# Altium PCB 飞控板.PcbDoc
Units mil, origin at the board's own origin, x right, y up, seen from the top; angles counter-clockwise.
Board outline 2740.03 x 2865.01 mil, 4 copper layers (Top Layer, VCC, GND, Bottom Layer); 69 components, 95 nets, 366 pads, 117 vias.
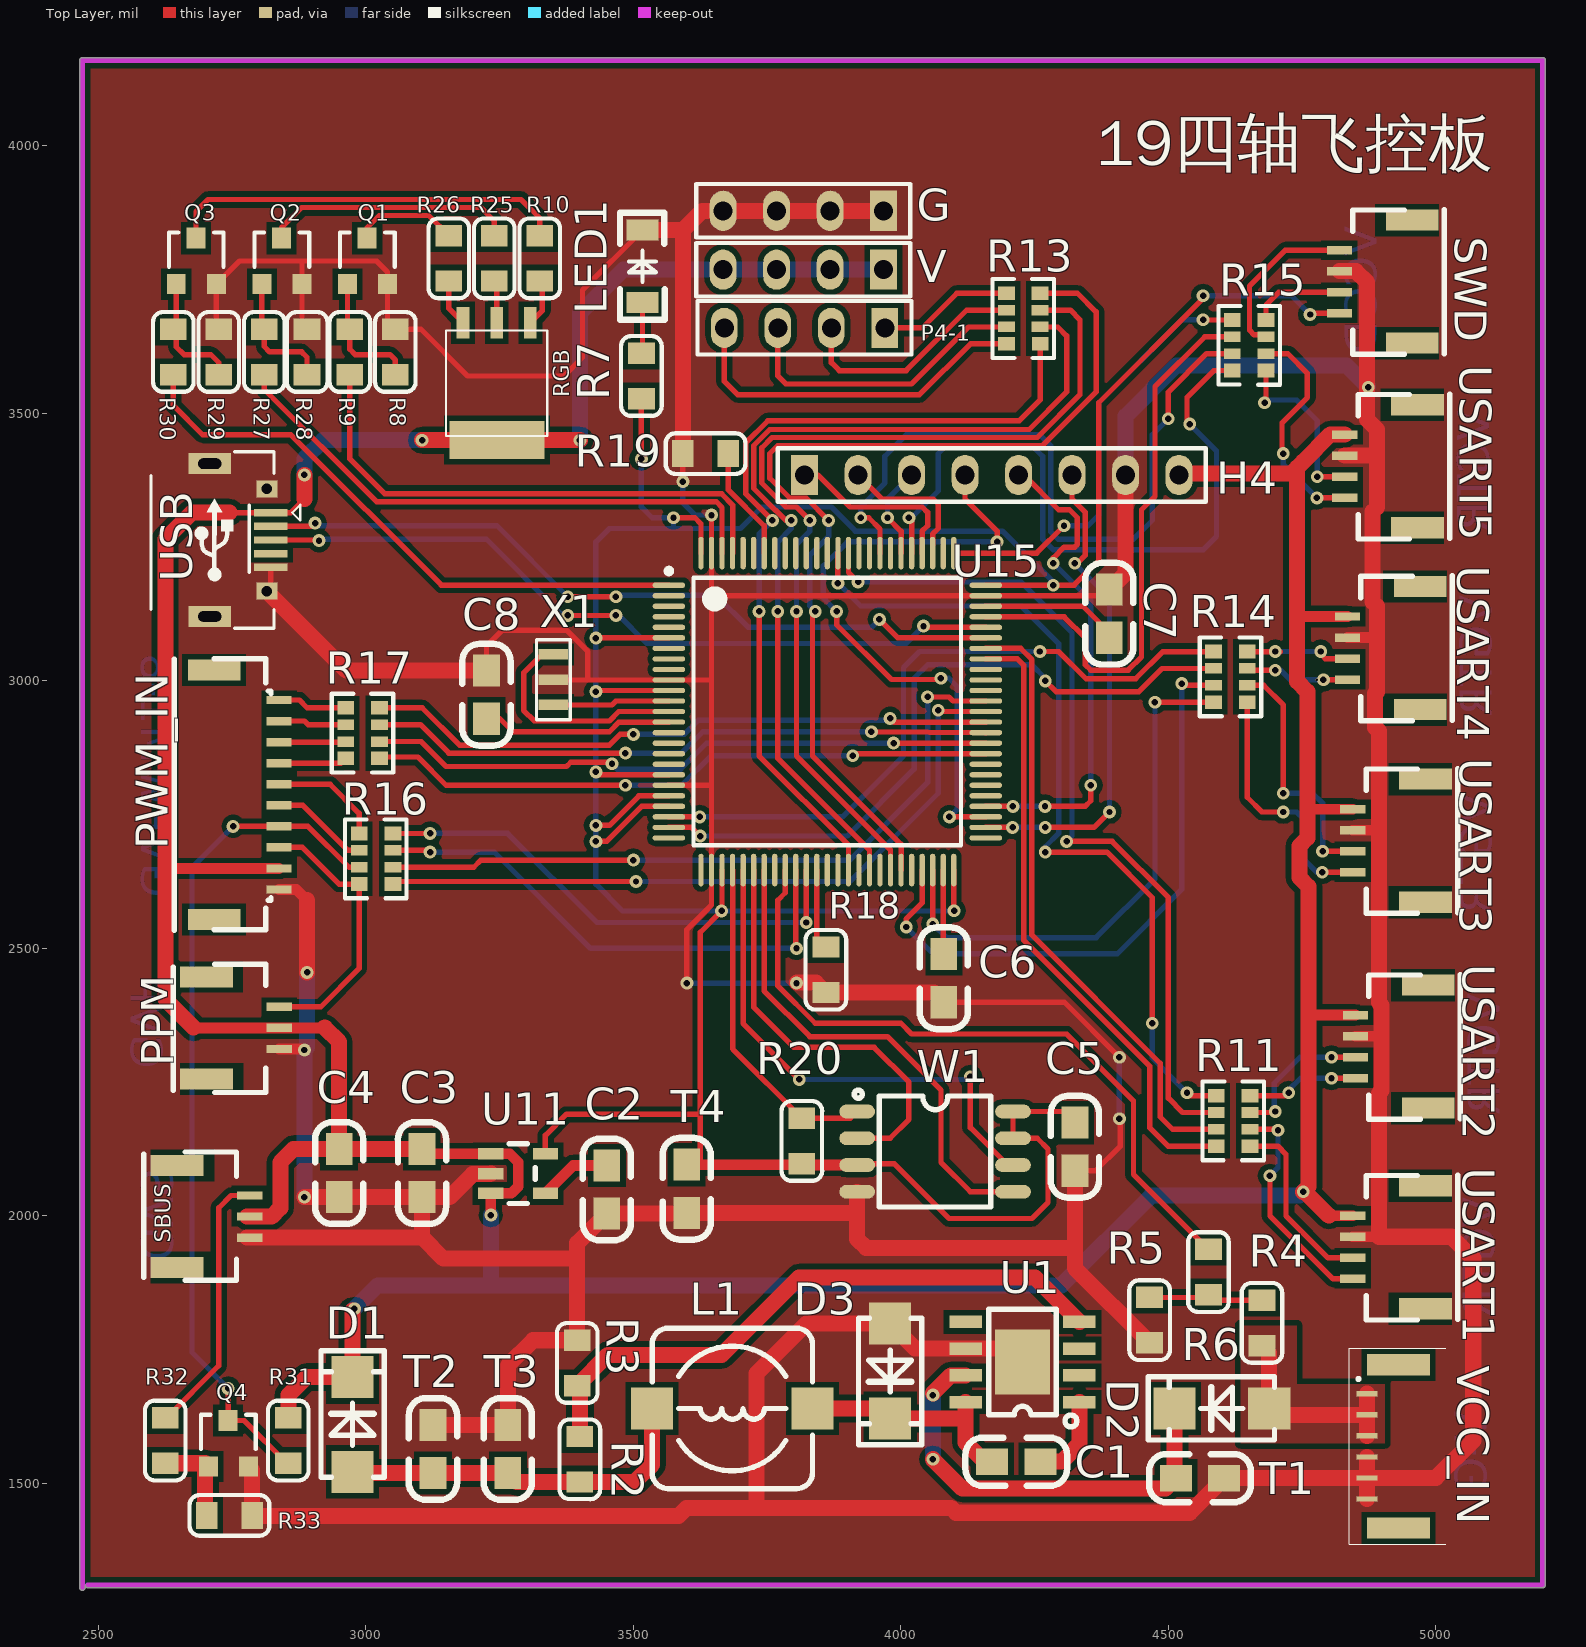
[diagram p0: Top Layer view]
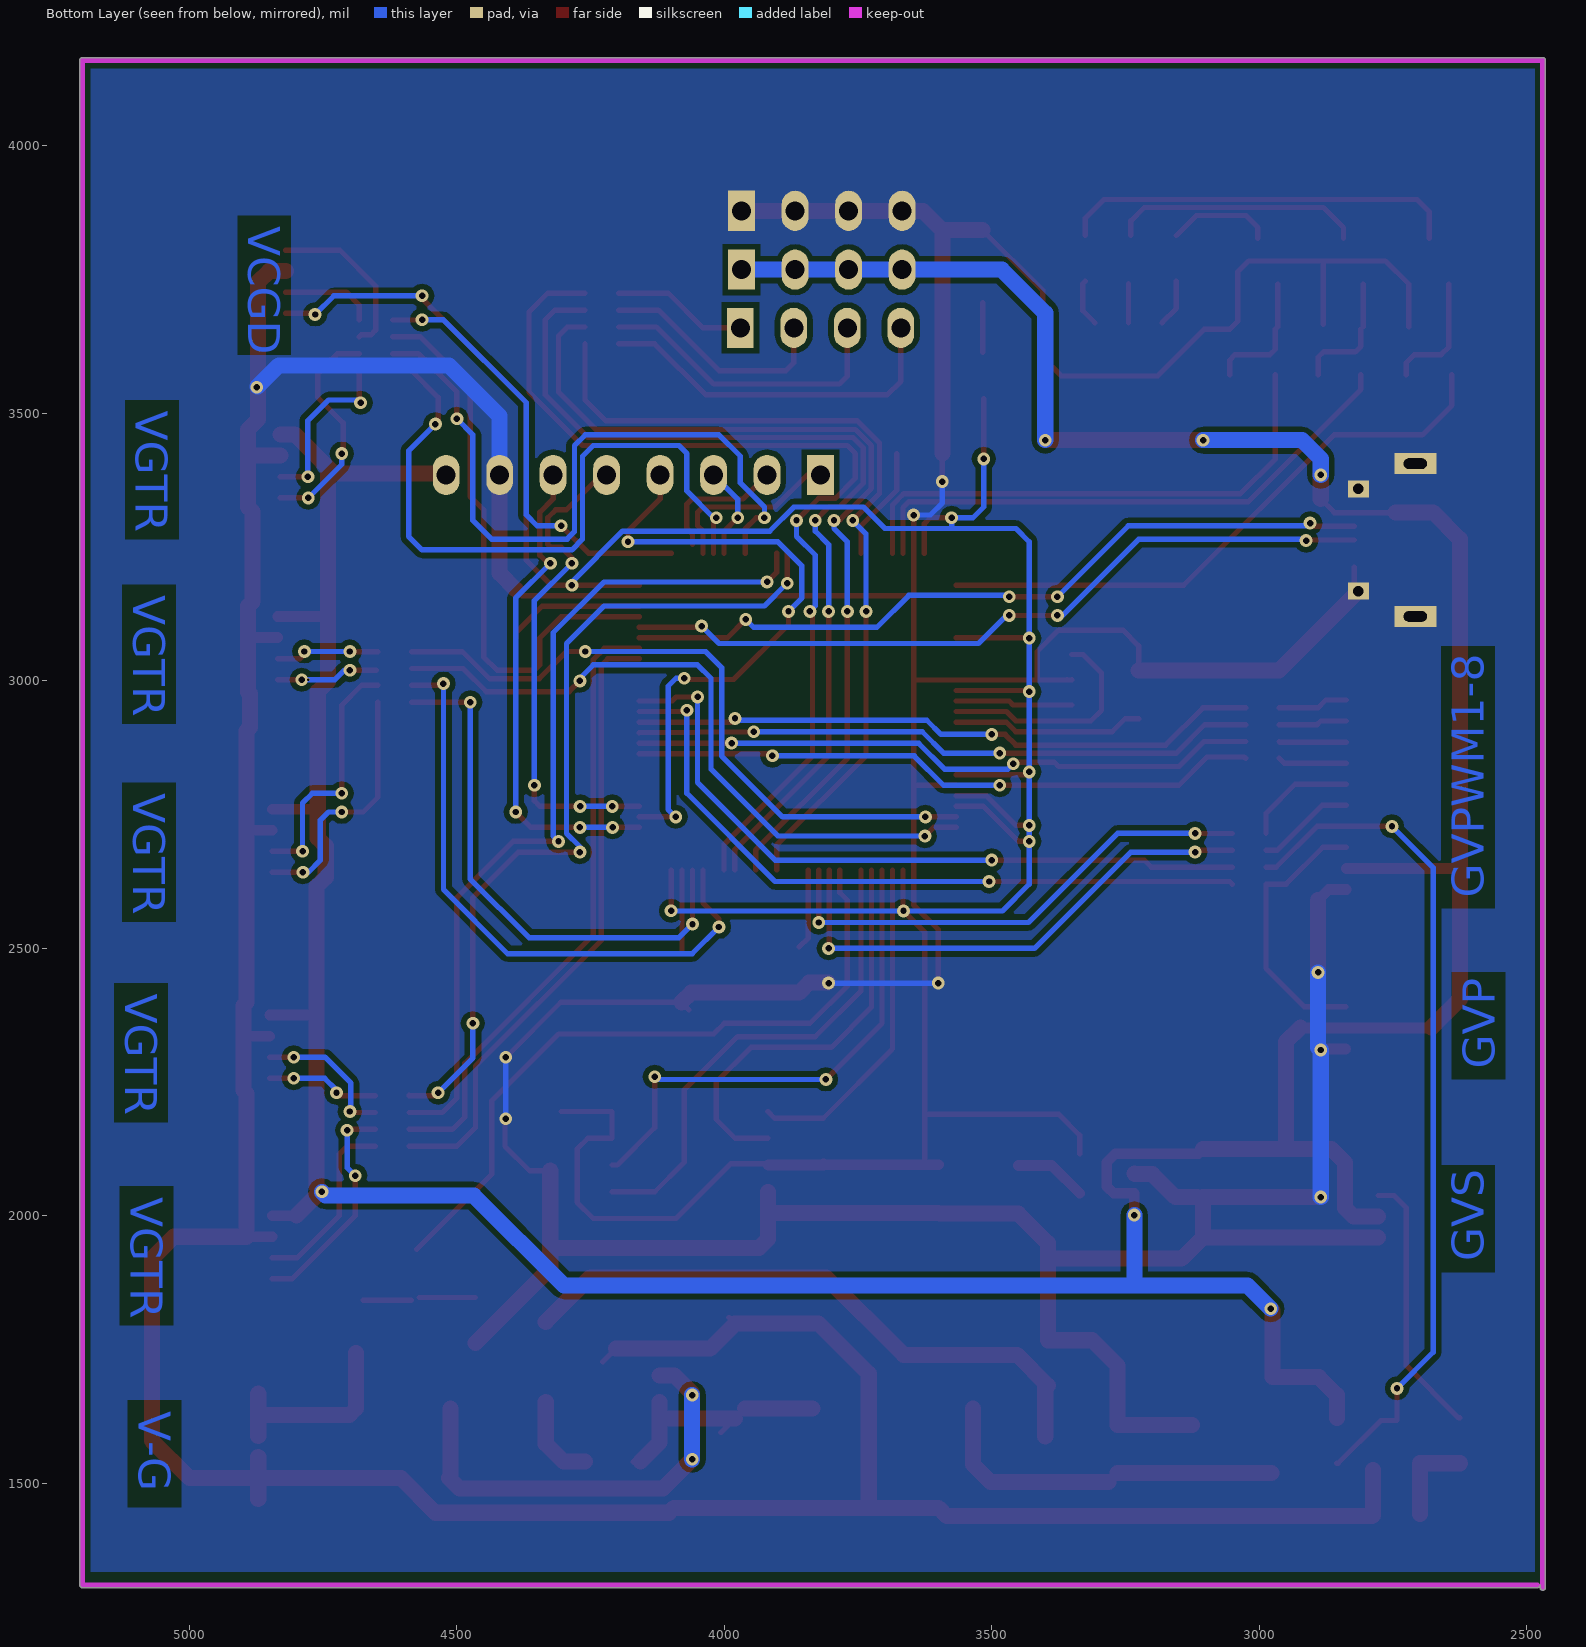
[diagram p1: Bottom Layer view, seen from below]
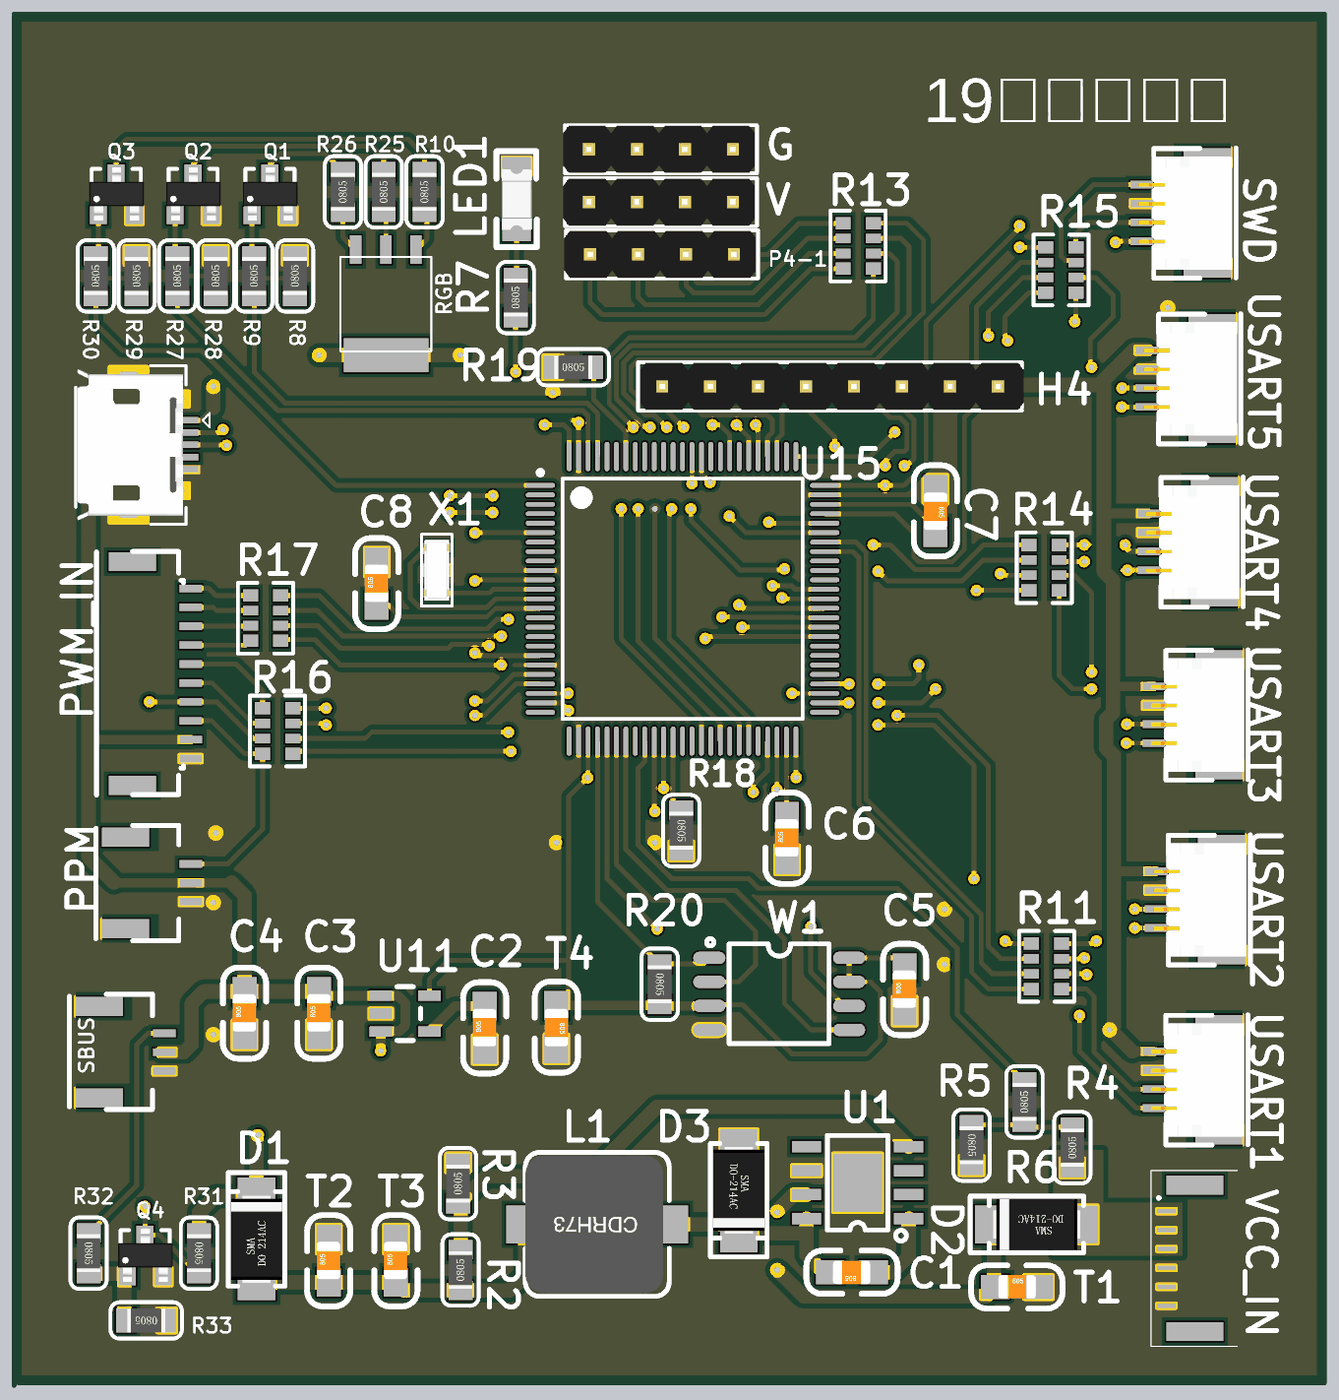
[diagram p2: 3D render of the assembled board from above, using the file's embedded part models]

## Layer stack, top to bottom
Top Layer: signal copper 1.4
Dielectric: core 12.6, FR-4, Dk 4.8
VCC: signal copper 1.4
Dielectric: prepreg 12.6, FR-4, Dk 4.8
GND: signal copper 1.4
Dielectric: core 12.6, FR-4, Dk 4.8
Bottom Layer: signal copper 1.4

## Board outline
2464.99,1305 2464.99,4155 cw(c2470,4155) 2465.65,4157.5 cw(c2470,4160) 2470,4165.02 5200,4165.02 cw(c5200,4160) 5205.02,4160 5205.02,1310 cw(c5200,1310) 5200,1304.98 2480,1304.98 cw(c2480,1310) 2475.01,1309.45 2475.01,1305 cw(c2470,1305)

## Design rules (kind name [scope] priority, off if disabled: settings)
Clearance Clearance_5 [All] p1: gap=10
Clearance Clearance_4 [All] p2: gap=10
Clearance Clearance_3 [All] p3: gap=1
Clearance Clearance_2 [All] p4: gap=1
Clearance Clearance_1 [All] p5: gap=1
Clearance [All] p6: gap=1
PlaneConnect [All] p1: planeconnectstyle=Relief reliefexpansion=20 reliefentries=4 reliefconductorwidth=20 reliefairgap=10
PolygonConnect [All] p1: connectstyle=Direct reliefconductorwidth=20 reliefentries=4 polygonreliefangle="90 Angle"
RoutingVias [All] p1: holewidth=28 width=50 viastyle="Through Hole" minholewidth=28 minwidth=50 maxholewidth=28 maxwidth=50
SilkscreenOverComponentPads [All] p1: minsilkscreentomaskgap=10
SolderMaskExpansion [All] p1: expansion=4
Width [All] p1: maxlimit=30 minlimit=30 preferedwidth=30
26 further rules are at their usual default settings.

## Components (designator, comment, footprint, x,y, rotation, side; value= is the part's Value field where it differs from the comment)
C1 "10nF50V" 0805C 4260,1540 r180 top
C2 "0.1uf50v" 0805C 3450,2005 r90 top
C3 "0.1uf50v" 0805C 3104.6,2035.71 r90 top
C4 "4.7uf16v" 0805C 2949.6,2035.71 r90 top
C5 "1uf10v" 0805C 4325,2085 r90 top
C6 "0.1uf50v" 0805C 4080,2400 r90 top
C7 "0.1uf50v" 0805C 4390,3170 r270 top
C8 "0.1uf50v" 0805C 3225,2930 r90 top
D1 "1N5819" DO214AC_SMA 2975,1610 r90 top
D2 "1N5819" DO214AC_SMA 4600,1640 r180 top
D3 "1N5819" DO214AC_SMA 3980,1710 r270 top
G "Header 4" HDR1X4 3817.68,3878.78 r180 top (schematic designator H3)
H4 "Header 8" HDR1X8 4170,3385 r0 top
L1 "CD54-22UH2A" CDRH73 3685,1640 r180 top
LED1 "" LED-1206 3515,3785 r180 top
P4-1 "Header 4" HDR1X4 3820,3660 r180 top (schematic designator H1)
PPM "PPM" SH1.0-3P#1 2770,2370 r90 bottom (schematic designator U9)
PWM_IN "SH1.0-10P" SH1.0-10P 2755,2765 r90 top (schematic designator P1)
Q1 "" SI2310 2995,3780 r180 top
Q2 "" SI2310 2835,3780 r180 top
Q3 "" SI2310 2675,3780 r180 top
Q4 "" SI2310 2735,1570 r180 top
R2 "50K" 0805R 3400,1545 r90 top
R3 "15K" 0805R 3395,1725 r90 top
R4 "10K" 0805R 4675,1800 r90 top
R5 "1K" 0805R 4465,1805 r270 top
R6 "1K" 0805R 4575,1895 r90 top
R7 "1K" 0805R 3515,3570 r90 top
R8 "10K" 0805R 3055,3615 r90 top
R9 "1K" 0805R 2970,3615 r90 top
R10 "50R" 0805R 3325,3790 r90 top
R11 "1k0603" 1k0603#1 4620,2185 r270 top
R13 "1k0603" 1k0603#2 4230,3685 r270 top
R14 "1k0603" 1k0603#2 4615,3000 r90 top
R15 "1k0603" 1k0603#1 4650,3635 r270 top
R16 "1k0603" 1k0603#2 3020,2675 r270 top
R17 "1k0603" 1k0603#2 2995,2910 r270 top
R18 "10K" 0805R 3860,2460 r270 top
R19 "10K" 0805R 3635,3425 r0 top
R20 "4.3K" 0805R 3815,2140 r270 top
R25 "50R" 0805R 3240,3790 r90 top
R26 "50R" 0805R 3155,3790 r90 top
R27 "1K" 0805R 2810,3615 r90 top
R28 "10K" 0805R 2890,3615 r90 top
R29 "10K" 0805R 2725,3615 r90 top
R30 "1K" 0805R 2640,3615 r90 top
R31 "10K" 0805R 2855,1580 r270 top
R32 "10K" 0805R 2625,1580 r270 top
R33 "10K" 0805R 2745,1440 r180 top
RGB "" RGB_LED 3150,3655 r270 top
SBUS "SBUS" SH1.0-3P#2 2715,1980 r270 bottom (schematic designator U8)
SWD "SWD" SH1.0-4P 4930,3750 r270 top (schematic designator U10)
T1 "100uf25V" 0805C 4515,1510 r0 top
T2 "47UF16V" 0805C 3125,1520 r90 top
T3 "47UF16V" 0805C 3265,1520 r90 top
T4 "10uf25V" 0805C 3600,2095 r270 top
U1 "TPS5430" TPS5430 4235,1760 r90 top
U11 "MIC5219" MIC5219 3280,2065 r270 top
U15 "" STM32F407VGT6= 3855,2925 r0 top
USART1 "USART1" SH1.0-4P 4955,1945 r270 top (schematic designator U3)
USART2 "USART2" SH1.0-4P 4960,2320 r270 top (schematic designator U4)
USART3 "USART3" SH1.0-4P 4955,2705 r270 top (schematic designator U5)
USART4 "USART4" SH1.0-4P 4945,3065 r270 top (schematic designator U6)
USART5 "USART5" SH1.0-4P 4940,3405 r270 top (schematic designator U7)
USB "ANO-USB" ANO-USB 2720,3260 r270 bottom (schematic designator U2)
V "Header 4" HDR1X4 3817.68,3768.78 r180 top (schematic designator H2)
VCC_IN "sh1.0-6p" sh1.0-6p 4935,1590 r90 top (schematic designator sh1.0-6p)
W1 "W25Q32" W25Q32 4075,2115 r270 top
X1 "陶瓷晶振" 陶瓷晶振 3360,2995 r270 top

## Footprints (in the part's own frame and the unit in brackets; to place one, negate y for a bottom-side part, rotate by r counter-clockwise, add the part's x,y. Pads: shape width x height; smd on the part's side, far side on the other; paste and mask are expansions set on the pad)
1k0603#1 [mm]
  rect 0.65x0.8 smd: 1(-1.008,-0.774) 4(1.392,-0.774) 5(1.392,0.826) 8(-1.008,0.826)
  rect 0.5x0.8 smd: 2(-0.208,-0.774) 3(0.592,-0.774) 6(0.592,0.826) 7(-0.208,0.826)
  silkscreen extent -1.68,-1.42 2.06,1.5
1k0603#2 [mm]
  rect 0.65x0.8 smd: 1(-1.008,0.774) 4(1.392,0.774) 5(1.392,-0.826) 8(-1.008,-0.826)
  rect 0.5x0.8 smd: 2(-0.208,0.774) 3(0.592,0.774) 6(0.592,-0.826) 7(-0.208,-0.826)
  silkscreen extent -1.68,-1.5 2.06,1.42
0805C [mil]
  rect 60x50 smd: 1(-0.71,-0.4) 2(89.29,-0.4)
  silkscreen extent -51,-45 139,45, body extent 6,-25 84,25, height 31
0805R [mil]
  rect 40x50 smd: 1(-42.5,0) 2(42.5,0)
  silkscreen extent -75,-38 75,38, body extent -39,-25 39,25, height 22
ANO-USB [mm]
  rect 0.35x1.6 smd far side: 1(-1.385,-2.599) 2(-0.735,-2.599) 3(-0.085,-2.599) 4(0.565,-2.599) 5(1.215,-2.599)
  rect 1x2 hole 0.5 slot 1.1 at 90 deg: 5(-3.71,0.301) 5(3.54,0.301)
  rect 0.8x1 hole 0.5: 5(-2.51,-2.409) 5(2.34,-2.409)
  body extent -4.09,-2.59 3.92,3.01, height 2.8
CDRH73 [mm]
  rect 2x2 smd: 1(-3.81,0) 2(3.81,0)
  silkscreen extent -3.81,-3.81 3.81,3.81, body extent -3.49,-3.65 3.81,3.65, height 3.65
DO214AC_SMA [mm]
  rect 2x2 smd: 1(-2.25,0) 2(2.25,0)
  silkscreen extent -2.5,-1.5 3.5,1.5, body extent -2.33,-1.35 2.27,1.35, height 2.4
HDR1X4 [mm]
  rect 1.27x1.905 hole 0.9: 1(-3.81,0)
  oval 1.27x1.905 hole 0.9: 2(-1.27,0) 3(1.27,0) 4(3.81,0)
  silkscreen extent -5.08,-1.27 5.08,1.27, body extent -4.98,-1.25 5.18,1.25, height 8.2
HDR1X8 [mm]
  rect 1.27x1.905 hole 0.9: 1(-8.89,0)
  oval 1.27x1.905 hole 0.9: 2(-6.35,0) 3(-3.81,0) 4(-1.27,0) 5(1.27,0) 6(3.81,0) 7(6.35,0) 8(8.89,0)
  silkscreen extent -10.16,-1.27 10.16,1.27, body extent -10.06,-1.25 10.26,1.25, height 8.2
LED-1206 [mil]
  rect 59.05x39.37 smd: 1(-2,77.5) 2(-2,-57.5)
  silkscreen extent -44,-90 40,110, body extent -33,-52 30,74, height 43
MIC5219 [mil]
  rect 21.7x47.2 smd: 1(-51,-46.4) 2(-14,-46.4) 3(23,-46.4) 4(23,55.6) 5(-51,55.6)
  silkscreen extent -70,-12 42,37
RGB_LED [mm]
  rect 1.8x4.5 smd: 1(5.207,2.413)
  rect 1.5x0.6 smd: 2(-0.373,0.8) 4(-0.373,2.4) 6(-0.373,4)
  silkscreen extent 0,0 5,4.8, body extent 0,0 4.95,4.83, height 3
SH1.0-3P#1 [mm]
  rect 1x2.5 smd far side: 0(-2.897,-1.728) 0(1.945,-1.728)
  rect 0.4x1.2 smd far side: 1(0.525,1.729) 2(-0.475,1.729) 3(-1.475,1.729)
SH1.0-3P#2 [mm]
  rect 1x2.5 smd far side: 0(-2.897,1.728) 0(1.945,1.728)
  rect 0.4x1.2 smd far side: 1(0.525,-1.729) 2(-0.475,-1.729) 3(-1.475,-1.729)
SH1.0-4P [mm]
  rect 0.4x1.2 smd: 1(-1.406,-2.799) 2(-0.406,-2.799) 3(0.594,-2.799) 4(1.594,-2.799)
  rect 1x2.5 smd: 5(-2.827,0.658) 5(3.015,0.658)
  silkscreen extent -3.33,-2.16 3.55,2.18, body extent -2.89,-2.97 3.11,1.99, height 3.14
sh1.0-6p [mm]
  rect 0.25x1 smd: 1(1.968,1.621) 2(0.968,1.621) 3(-0.032,1.621) 4(-1.032,1.621) 5(-2.032,1.621) 6(-3.032,1.621)
  rect 1x3 smd: PAD(-4.407,0.121) PAD(3.343,0.121)
  silkscreen extent -5.18,-2.13 4.12,2.45
SH1.0-10P [mm]
  rect 1x2.5 smd: 0(-5.358,0.982) 0(6.484,0.982)
  rect 0.4x1.2 smd: 1(-3.937,-2.099) 2(-2.937,-2.099) 3(-1.937,-2.099) 4(-0.937,-2.099) 5(0.063,-2.099) 6(1.063,-2.099) 7(2.063,-2.099) 8(3.063,-2.099) 9(4.063,-2.099) 10(5.063,-2.099)
  silkscreen extent -5.87,-1.72 7.02,2.88
SI2310 [mm]
  rect 0.9x0.95 smd: 1(0.75,0.976) 2(-1.155,0.976)
  rect 0.9x1 smd: 3(-0.19,-1.208)
  silkscreen extent -1.5,-1.47 1.1,0.15, body extent -1.67,-1.54 1.23,1.26, height 1.3
STM32F407VGT6= [mm]
  oval 1.55x0.25 smd: 1(-7.33,6.449) 2(-7.33,5.949) 3(-7.33,5.449) 4(-7.33,4.949) 5(-7.33,4.449) 6(-7.33,3.949) 7(-7.33,3.449) 8(-7.33,2.949) 9(-7.33,2.449) 10(-7.33,1.949) 11(-7.33,1.449) 12(-7.33,0.949) 13(-7.33,0.449) 14(-7.33,-0.051) 15(-7.33,-0.551) 16(-7.33,-1.051) 17(-7.33,-1.551) 18(-7.33,-2.051) 19(-7.33,-2.551) 20(-7.33,-3.051) 21(-7.33,-3.551) 22(-7.33,-4.051) 23(-7.33,-4.551) 24(-7.33,-5.051) 25(-7.33,-5.551) 51(7.72,-5.551) 52(7.72,-5.051) 53(7.72,-4.551) 54(7.72,-4.051) 55(7.72,-3.551) 56(7.72,-3.051) 57(7.72,-2.551) 58(7.72,-2.051) 59(7.72,-1.551) 60(7.72,-1.051) 61(7.72,-0.551) 62(7.72,-0.051) 63(7.72,0.449) 64(7.72,0.949) 65(7.72,1.449) 66(7.72,1.949) 67(7.72,2.449) 68(7.72,2.949) 69(7.72,3.449) 70(7.72,3.949) 71(7.72,4.449) 72(7.72,4.949) 73(7.72,5.449) 74(7.72,5.949) 75(7.72,6.449)
  oval 0.25x1.55 smd: 26(-5.805,-7.076) 27(-5.305,-7.076) 28(-4.805,-7.076) 29(-4.305,-7.076) 30(-3.805,-7.076) 31(-3.305,-7.076) 32(-2.805,-7.076) 33(-2.305,-7.076) 34(-1.805,-7.076) 35(-1.305,-7.076) 36(-0.805,-7.076) 37(-0.305,-7.076) 38(0.195,-7.076) 39(0.695,-7.076) 40(1.195,-7.076) 41(1.695,-7.076) 42(2.195,-7.076) 43(2.695,-7.076) 44(3.195,-7.076) 45(3.695,-7.076) 46(4.195,-7.076) 47(4.695,-7.076) 48(5.195,-7.076) 49(5.695,-7.076) 50(6.195,-7.076) 76(6.195,7.974) 77(5.695,7.974) 78(5.195,7.974) 79(4.695,7.974) 80(4.195,7.974) 81(3.695,7.974) 82(3.195,7.974) 83(2.695,7.974) 84(2.195,7.974) 85(1.695,7.974) 86(1.195,7.974) 87(0.695,7.974) 88(0.195,7.974) 89(-0.305,7.974) 90(-0.805,7.974) 91(-1.305,7.974) 92(-1.805,7.974) 93(-2.305,7.974) 94(-2.805,7.974) 95(-3.305,7.974) 96(-3.805,7.974) 97(-4.305,7.974) 98(-4.805,7.974) 99(-5.305,7.974) 100(-5.805,7.974)
  silkscreen extent -7.45,-5.9 6.55,7.25
TPS5430 [mm]
  rect 0.6x1.55 smd: 1(-2.747,-2.508) 2(-1.477,-2.508) 3(-0.207,-2.508) 4(1.063,-2.508) 5(1.063,2.892) 6(-0.207,2.892) 7(-1.477,2.892) 8(-2.747,2.892)
  rect 3.1x2.6 smd: 9(-0.842,0.192)
  silkscreen extent -3.93,-2.39 1.66,1.79
W25Q32 [mil]
  oval 25.59x66.86 smd: 1(-80,-156.54) 2(-30,-156.54) 3(20,-156.54) 4(70,-156.54) 5(70,134.81) 6(20,134.81) 7(-30,134.81) 8(-80,134.81)
  silkscreen extent -120,-162 99,93
陶瓷晶振 [mm]
  rect 0.5x1.4 smd: 1(-1.384,-0.24) 2(-0.184,-0.24) 3(1.016,-0.24)
  silkscreen extent -2.08,-1.04 1.72,0.56, body extent -1.78,-0.89 1.42,0.41, height 0.7

## Part data
D1 D2 D3: library part 1N58
PWM_IN: library part S
U15: library part STM32F

## Free pads (board coordinates)
  round 5 hole 5: 0(3485,2865) 0(3624.17,2745.83) 0(4260,3055) 0(4777.77,3002.23)
  round 13 hole 8: 0(4050,2970) 0(4070,2945)

## Via types
v1: diameter 24, hole 12, Top Layer to Bottom Layer, 116 vias
v2: diameter 24, hole 12, Top Layer to Bottom Layer, tented top, 1 vias

## Nets (pads, with @x,y where several pads share a name; then routed paths per layer and width w, separated by ;. In a path a pad name is that pad's centre, name@x,y a point inside that pad or via, vN(x,y) a via of type N, cw(c..) or ccw(c..) an arc to the next point about the centre after c; other vN are vias at no path point)
BOOT1: R18.1 U15.37 | length 151
  Top Layer w10: U15.37 3843,2519.5 R18.1
GND: C2.1 C3.1 C4.1 C5.1 C6.1 C7.1 C8.2 D3.1 G.1 G.2 G.3 G.4 H4.7 LED1.2 PPM.3 PWM_IN.1 Q1.2 Q2.2 Q3.2 Q4.2 R3.2 R5.2 R8.2 R18.2 R19.1 R28.2 R29.2 R33.1 SBUS.1 SWD.2 T1.2 T2.2 T3.2 T4.2 U1.6 U1.9 U11.2 U15.10 U15.20 U15.27 U15.74 U15.99 USART1.2 USART2.2 USART3.2 USART4.2 USART5.2 USB.5 VCC_IN.4 VCC_IN.5 VCC_IN.6 W1.4 X1.2 | length 16995.1
  Top Layer w10: R29.2@2720.48,3662.02 Q3.2 2763.91,3785 3020,3785 3040.48,3764.52 Q1.2 3040.48,3672.02 R8.2 3102.5,3657.5 3190,3570 3370,3570 3405,3605 3405,3730.5 LED1.2 ; USB.5@2814.84,3167.87 2822.32,3175.35 USB.5@2822.32,3212.17 ; PPM.3 PPM.3@2839.99,2310 ; R28.2@2880.48,3667.02 Q2.2 2880.48,3780.48 ; v1@2883.09,2311.91 v1(2885,2310) ; C3.1 C3.1@3115,2035 ; C8.2@3221.11,3015 C8.2 3225.4,3065.4 3255,3095 3375,3095 3415,3055 3415,3001.74 ; X1.2 3351.06,3001.74 X1.2@3360.47,3001.74 ; X1.2@3359.45,3002.76 X1.2@3360.47,3001.74 ; U15.20 3646.01,2804.88 ; v1(3592.5,3372.5) R19.1 ; v1(3600,2435) 3600,2535 3646.14,2581.14 U15.27 3646.14,3001.74 ; v1(3646.14,3310) U15.99 3646.14,3001.74 ; 3646.92,3159.22 U15.74 4378.11,3159.22 C7.1 ; D3.1 D3.1@3991.42,1810 ; C6.1@4066.11,2385 C6.1 4305.71,2399.29 v1(4408.6,2296.4) ; U1.9@4202.45,1751.85 U1.9 ; C5.1 4364.29,2084.29 4410,2130 v1@4410,2180 ; T1.2 T1.2@4606.93,1512.23 ; X1.2@3360.47,3001.74 3415,3001.74 ; 3415,3001.74 U15.10 3646.14,3001.74
  Top Layer w20: PWM_IN.1 2870,2610 2890,2590 ; PPM.3 v1@2883.09,2311.91 ; USART4.2 4885.97,3080.97 ; USART1.2 4892.47,1960.97 ; USART3.2 4892.47,2720.97 ; USART2.2 4897.47,2335.97
  Top Layer w30: SBUS.1@2778.08,1959.35 3104.35,1959.35 ; Q4.2@2787.5,1524.55 R33.1 2788.79,1438.71 3584.01,1438.71 3599.52,1454.22 3730,1454.22 ; USB.5@2814.84,3167.87 2963.42,3019.29 C8.2 ; v1(2885,2035) C4.1 C3.1 3105,1960 3145,1920 3390,1920 ; v1(2890,2455) 2890,2590 ; C3.1@3115,2035 3156.79,2035 3199.64,2077.85 3232.45,2077.85 U11.2 ; T2.2 T3.2 3265.4,1720.4 3312.5,1767.5 R3.2 3395,1948.89 C2.1 T4.2@3598.19,2004.29 ; LED1.2 3592.5,3842.5 ; R19.1 3592.5,3842.5 ; T4.2 3917.76,2005.71 ; G.4 G.4@3670,3878.78 ; G.4@3675,3883.78 G.4@3670,3878.78 ; v1@3806.21,2436.21 3841.29,2436.21 R18.2 4062.2,2417.5 C6.1 ; W1.4 3918.46,1956.54 3935,1940 4320,1940 ; G.1 G.2 G.3 G.4@3670,3878.78 ; U1.9@4202.45,1751.85 U1.6 4026.73,1751.85 D3.1 3823.58,1798.58 3730,1705 3730,1454.22 ; C5.1 4325.4,1902.1 R5.2 ; C7.1 4420,3201.11 H4.7 ; T1.2@4604.29,1509.24 4540.05,1445 4103.43,1445 4094.21,1454.22 3730,1454.22 ; T1.2 4825,1509.6 ; SWD.2 4850.73,3765.97 4871.71,3745 4871.71,3488.29 4890,3470 4890,3324.62 4881.71,3316.33 4881.71,3147.95 4890,3139.66 4890,2979.62 4886.71,2976.33 4886.71,2912.95 ; 4825.41,1510 VCC_IN.5 ; USART5.2 4889.03,3420.97 ; VCC_IN.6 VCC_IN.5 ; VCC_IN.4 VCC_IN.5 ; 4890,2909.66 4893.44,2906.22 4893.44,2398.57 4898.44,2393.57 4898.44,2234 4893.44,2229 4893.44,1960.97 5029.03,1960.97 5070,1920 5070,1580 5000,1510 VCC_IN.5 ; 3592.5,3842.5 3628.78,3878.78 G.4@3670,3878.78
  Bottom Layer w10: v1(2885,2035) v1@2891.28,2041.28 ; v1@2885,2450 v1(2890,2455) ; v1(3592.5,3372.5) 3592.5,3332.5 3615,3310 v1(3646.14,3310) ; v1(3600,2435) v1(3805,2435) ; v1(4408.6,2181.4) v1(4408.6,2296.4) ; v1@4872.8,3550 v1(4873.9,3548.9)
  Bottom Layer w30: v1(2885,2035) v1(2885,2310) ; v1@2890,2315 v1(2890,2455) ; H4.7 4420,3495 4515,3590 4832.8,3590 v1@4872.8,3550
LED_1: R9.1 U15.97 | length 999
  Top Layer w10: R9.1 2970,3415 3035,3350 3665,3350 3666.5,3348.5 3666.5,3347.94 3685.51,3328.94 U15.97
LED_2: R27.1 U15.98 | length 1060
  Top Layer w10: R27.1 2810,3545 3020,3335 3655,3335 3665.83,3324.17 U15.98
LED_3: R30.1 U15.1 | length 1123.1
  Top Layer w10: R30.1 2640,3515 2695,3460 2860,3460 3141.1,3178.9 U15.1
NetC1_1: C1.1 U1.1 | length 165
  Top Layer w30: C1.1 4300.4,1540.4 4333.75,1573.75 U1.1
NetC1_2: C1.2 D3.2 L1.1 U1.8 | length 477.2
  Top Layer w10: D3.2@3961.42,1640 D3.2 D3.2@4006.42,1595 ; C1.2@4149.6,1540.4 4156.9,1540.4 C1.2
  Top Layer w30: L1.1 D3.2@3961.42,1640 ; D3.2 4119.73,1621.42 ; U1.8 4121.15,1576.15 C1.2@4156.9,1540.4
NetC2_2: C2.2 U11.4 | length 136.5
  Top Layer w20: U11.4 3387.89,2094.29 C2.2
NetC6_2: C6.2 U15.49 | length 155.9
  Top Layer w10: C6.2@4079.22,2490.48 U15.49
NetC7_2: C7.2 U15.73 | length 260.7
  Top Layer w10: U15.73 4340.47,3139.53 4389.6,3090.4 C7.2
NetC8_1: C8.1 U15.14 | length 358.5
  Top Layer w10: C8.1 3250.71,2929.29 3275,2905 3455,2905 3472.99,2922.99 U15.14
NetD1_1: D1.1 L1.2 R2.1 T2.1 T3.1 | length 683.3
  Top Layer w10: T3.1 T3.1@3282.2,1502.5
  Top Layer w30: D1.1@2977.12,1519.29 T2.1 T3.1 ; T3.1@3282.2,1502.5 R2.1 3502.5,1502.5 3535,1535 L1.2
NetLED1_1: LED1.1 R7.2 | length 93
  Top Layer w10: R7.2@3517,3614.5 LED1.1
NetQ1_1: Q1.1 R8.1 R9.2 | length 237.8
  Top Layer w10: R9.2@2965.48,3662.02 Q1.1 ; R9.2 2970,3620 2980,3610 3045,3610 3055,3600 R8.1
NetQ1_3: Q1.3 R26.2 | length 197.3
  Top Layer w10: Q1.3 3002.48,3847.48 3025,3870 3117.5,3870 R26.2
NetQ2_1: Q2.1 R27.2 R28.1 | length 232.8
  Top Layer w10: R27.2@2805.48,3662.02 Q2.1 ; R27.2 2810,3625 2820,3615 2880,3615 2890,3605 R28.1
NetQ2_3: Q2.3 R25.2 | length 470.8
  Top Layer w10: Q2.3 2842.48,3847.48 2880,3885 3215,3885 3240,3860 R25.2
NetQ3_1: Q3.1 R29.1 R30.2 | length 231.3
  Top Layer w10: Q3.1 2645.48,3624.52 2660,3610 2710,3610 2725,3595 R29.1
NetQ3_3: Q3.3 R10.2 | length 748.8
  Top Layer w10: Q3.3 2682.48,3877.48 2705,3900 3290,3900 3325,3865 R10.2
NetQ4_1: Q4.1 R32.2 R33.2 | length 169.1
  Top Layer w30: R32.2 2699.55,1537.5 R33.2@2699.55,1442.95
NetR2_2: R2.2 R3.1 U1.4 | length 1147.1
  Top Layer w30: R3.1 3452.5,1740 3665,1740 3810,1885 4250.6,1885 U1.4 ; R2.2 R3.1@3400,1677.5
NetR4_2: R4.2 R5.1 R6.1 | length 195
  Top Layer w10: R5.1 R6.1@4570,1847.5 ; R6.1@4585,1842.5 R4.2
NetR10_1: R10.1 RGB.6 | length 89.2
  Top Layer w10: RGB.6 3330,3692.2 3330,3742.5 R10.1
NetR19_2: R19.2 U15.94 | length 213.8
  Top Layer w10: R19.2 3677.5,3357.04 3744.57,3289.98 U15.94
NetR25_1: R25.1 RGB.4 | length 73.3
  Top Layer w10: RGB.4 R25.1@3244.49,3743.01
NetR26_1: R26.1 RGB.2 | length 88.8
  Top Layer w10: R26.1 3155,3696.18 RGB.2
NetU15_12: U15.12 X1.3 | length 218.9
  Top Layer w10: X1.3 3460,2955 3467.37,2962.37 U15.12
NetU15_13: U15.13 X1.1 | length 426.9
  Top Layer w10: X1.1 3329.49,3049.49 3295,3015 3295,2945 3315,2925 3455,2925 3472.68,2942.68 U15.13
OTG_FS_DM: U15.70 USB.2 | length 1431.8
  Top Layer w10: USB.2 2898.94,3288.94 v1(2905,3295) ; v1(3377.37,3157.37) v1(3467.37,3157.37) ; v1(3960,3115) 3994.52,3080.48 U15.70
  Bottom Layer w10: v1@2910,3290 3244.74,3290 v1(3377.37,3157.37) ; v1@3470,3160 3655,3160 3715,3100 3945,3100 v1(3960,3115)
OTG_FS_DP: U15.71 USB.3 | length 1424.2
  Top Layer w10: USB.3 2911.39,3263.35 v1(2912.37,3262.37) ; v1(3377.37,3122.37) v1(3467.37,3122.37) ; v1@4045.16,3100.16 U15.71
  Bottom Layer w10: v1@2915,3265 3225,3265 3367.63,3122.37 v1(3377.37,3122.37) ; v1@3470,3125 3525,3070 4010,3070 v1(4042.37,3102.37)
POWER_INPUT: R6.2 U15.34 | length 1311.7
  Top Layer w10: U15.34 3783.94,2603.94 3770,2590 3770,2430 3840,2360 4000,2360 4020,2340 4310,2340 4435,2215 4435,2077.5 R6.2
PPM_IN: PPM.1 PWM_IN.3 R16.5 | length 515.1
  Top Layer w10: PWM_IN.3 2881.26,2688.74 2949.81,2620.19 R16.5 2987.48,2462.48 2915.65,2390.65 PPM.1
PWMIN_2: PWM_IN.4 Q4.3 R16.6 R31.2 | length 1583.3
  Top Layer w10: v1(2742.48,1677.48) Q4.3 2772.43,1617.57 2852.5,1537.5 R31.2 ; v1(2751.89,2728.11) PWM_IN.4 2891.89,2728.11 2968.32,2651.68 R16.6
  Bottom Layer w10: v1(2742.48,1677.48) 2675,1744.96 2675,2651.22 v1(2751.89,2728.11)
PWMIN_3: PWM_IN.5 R16.7 | length 184.8
  Top Layer w10: PWM_IN.5 2882.52,2767.48 2966.82,2683.18 R16.7
PWMIN_4: PWM_IN.6 R16.8 | length 210.2
  Top Layer w10: PWM_IN.6 2933.15,2806.85 2987.48,2752.52 R16.8
PWMIN_5: PWM_IN.7 R17.5 | length 128.6
  Top Layer w10: PWM_IN.7 2953.52,2846.22 R17.5
PWMIN_6: PWM_IN.8 R17.6 | length 125.3
  Top Layer w10: PWM_IN.8 2961.39,2885.59 R17.6
PWMIN_7: PWM_IN.9 R17.7 | length 127.7
  Top Layer w10: PWM_IN.9 2837.68,2925 2885,2925 2891.82,2918.18 R17.7
PWMIN_8: PWM_IN.10 R17.8 | length 130.9
  Top Layer w10: PWM_IN.10 2875.67,2964.33 2890.33,2949.67 R17.8
PWMOUT_1: P4-1.1 R13.8 | length 254.3
  Top Layer w10: P4-1.1 4040,3660 4104.67,3724.67 R13.8
PWMOUT_2: P4-1.2 R13.7 | length 445.6
  Top Layer w10: P4-1.2 3870,3595 3885,3580 4010,3580 4123.18,3693.18 R13.7
PWMOUT_3: P4-1.3 R13.6 | length 567.9
  Top Layer w10: P4-1.3 3770,3570 3785,3555 4020,3555 4126.68,3661.68 R13.6
PWMOUT_4: P4-1.4 R13.5 | length 677.3
  Top Layer w10: P4-1.4 3670,3560 3695,3535 4035,3535 4130.19,3630.19 R13.5
SPI1_CLK: U15.30 W1.6 | length 953.7
  Top Layer w10: U15.30 3705.2,2359.8 v1(3810,2255) ; v1(4130,2260) 4130,2164.86 4199.86,2095 W1.6
  Bottom Layer w10: v1(3810,2255) v1@4125,2255
SPI1_MISO: U15.31 W1.2 | length 785.5
  Top Layer w10: U15.31 3724.88,2390.12 3800,2315 3950,2315 4015,2250 4015,2180 3980,2145 W1.2
SPI1_MOSI: U15.32 W1.5 | length 925.8
  Top Layer w10: U15.32 3744.57,2420.43 3830,2335 3975,2335 4075,2235 4075,2100 4130,2045 W1.5
SPI1_NSS: R20.1 U15.29 W1.1 | length 624.8
  Top Layer w10: 3685.51,2311.99 U15.29 ; 3686.5,2311 R20.1 3905.96,2182.5 W1.1
SPI2_CLK: H4.6 U15.52 | length 916.5
  Top Layer w10: U15.52 v1(4208.86,2726.14) ; v1(4270,2726.14) 4361.14,2726.14 v1(4390,2755) ; H4.6 4320,3340 4345,3315 4345,3235 v1@4330,3220
  Bottom Layer w10: v1(4208.86,2726.14) v1(4270,2726.14) ; v1(4325,3220) 4390,3155 v1(4390,2755)
SPI2_CS1: H4.3 U15.81 | length 195.3
  Top Layer w10: v1(3975,3305) 4000.48,3279.52 U15.81
  Bottom Layer w10: v1(3975,3305) 3975,3340 H4.3 H4.3@4020,3365
SPI2_CS2: H4.2 U15.78 | length 252
  Top Layer w10: H4.2 3965,3340 4060.53,3340 4070,3330.53 4070,3285 4059.53,3274.53 U15.78@4059.53,3255.47
SPI2_CS3: H4.1 U15.79 | length 359.3
  Top Layer w10: H4.1@3820,3365 H4.1 3845,3385 3905,3325 4040,3325 4050,3315 4050,3290 4039.85,3279.85 U15.79
SPI2_MISO: H4.4 U15.53 | length 1206.7
  Top Layer w10: v1(3880,3130) 3880,3105 3982.5,3002.5 4072.5,3002.5 v1(4075,3005) ; v1(4090.83,2745.83) U15.53 ; H4.4 4120,3340 4180,3280 v1(4180,3260)
  Bottom Layer w10: v1(3880,3130) 3855,3155 3855,3215 3900,3260 v1(4180,3260) ; v1(4075,3005) 4090,3005 4105,2990 4105,2760 v1(4090.83,2745.83)
SPI2_MOSI: H4.5 U15.54 | length 931.9
  Top Layer w10: U15.54 v1(4209.49,2765.51) ; H4.5 4230,3385 4295,3320 4315,3320 4330,3305 4330,3255 4325,3250 4305,3250 4285,3230 v1(4285,3220) ; v1(4269.49,2765.51) 4344.49,2765.51 4355,2776.01 v1(4355,2805)
  Bottom Layer w10: v1(4209.49,2765.51) v1(4269.49,2765.51) ; v1(4285,3220) 4355,3150 v1(4355,2805)
SPI2_NSS: U15.51
SUBS_IN: R32.1 SBUS.3 | length 498
  Top Layer w10: R32.1 2627.5,1622.5 2725,1720 2725,2015 2748.09,2038.09 SBUS.3@2778.08,2038.09
SWCLK: R15.1 U15.76 | length 824.4
  Top Layer w10: U15.76 4253.94,3238.94 v1(4305,3290) ; v1(4565,3675) 4565.33,3674.67 R15.1
  Bottom Layer w10: v1(4305,3290) 4350,3290 4370,3310 4370,3520 4525,3675 v1(4565,3675)
SWCLK_I: R15.8 SWD.3 | length 175.1
  Top Layer w10: R15.8 4682.52,3702.52 4706.6,3726.6 SWD.3
SWDIO: R15.2 U15.72 | length 1070.5
  Top Layer w10: U15.72 4305.15,3119.85 4345,3080 4345,3030 4355,3020 4425,3020 4450,3045 4450,3320 4475,3345 4475,3550 4568.18,3643.18 R15.2
SWDIO_I: R15.7 SWD.1 | length 314.4
  Top Layer w10: R15.7 4678.82,3646.88 4660.56,3646.88 4651.78,3655.66 4651.78,3738.28 4718.84,3805.34 SWD.1
TIM1_CH1: R13.4 U15.40 | length 1587.4
  Top Layer w10: v1(3735,3130) 3735,2860 3902.05,2692.95 U15.40 ; v1(3760,3300) 3710,3350 3710,3445 3751.22,3486.22 4221.22,3486.22 4260.47,3525.47 R13.4
  Bottom Layer w10: v1(3735,3130) 3735,3275 v1(3760,3300)
TIM1_CH2: R13.3 U15.42 | length 1697.9
  Top Layer w10: v1(3770,3130) 3770,2855 3941.42,2683.58 U15.42 ; v1(3795,3300) 3785,3300 3778,3307 3778,3307.46 3767.46,3318 3767,3318 3725,3360 3725,3440 3755,3470 4240,3470 4310,3540 4310,3645 4293.32,3661.68 R13.3
  Bottom Layer w10: v1(3770,3130) 3770,3260 3795,3285 v1(3795,3300)
TIM1_CH3: R13.2 U15.44 | length 1779.6
  Top Layer w10: v2(3805,3130) 3805,2860 3980.79,2684.21 U15.44 ; v1(3830,3300) 3805,3325 3785,3325 3740,3370 3740,3435.56 3759.44,3455 4255,3455 4335,3535 4335,3675 4316.82,3693.18 R13.2
  Bottom Layer w10: v2(3805,3130) 3805,3255 3830,3280 v1(3830,3300)
TIM1_CH4: R13.1 U15.45 | length 1858.1
  Top Layer w10: v1(3840,3130) 3835,3125 3835,2860 4000.48,2694.52 U15.45 ; v1(3865,3300) 3823.5,3341.5 3792.51,3341.5 3755,3379.01 3755,3425 3770,3440 4265,3440 4365,3540 4365,3690 4330.33,3724.67 R13.1
  Bottom Layer w10: v1(3840,3130) 3830,3140 3830,3235 3865,3270 v1(3865,3300)
TIM3_CH1: pad.0@4070,2945 R16.4 U15.63 | length 1334.8
  Top Layer w10: R16.4 3055.28,2625 v1(3505,2625) ; v1(4070,2945) 4072.32,2942.68 U15.63
  Bottom Layer w10: v1(3505,2625) 3905,2625 4070,2790 v1(4070,2945)
TIM3_CH2: pad.0@4050,2970 R16.3 U15.64 | length 1337.2
  Top Layer w10: R16.3 3201.68,2651.68 3215,2665 v1(3500,2665) ; v1(4050,2970) 4090,2970 4097.63,2962.37 U15.64
  Bottom Layer w10: v1(3500,2665) 3905,2665 4050,2810 v1(4050,2970)
TIM3_CH3: R16.2 U15.35 | length 977.4
  Top Layer w10: R16.2 3116.82,2683.18 v1(3120,2680) ; U15.35 3803.62,2501.38 v1(3805,2500)
  Bottom Layer w10: v1(3120,2680) 3240,2680 3420,2500 v1(3805,2500)
TIM3_CH4: R16.1 U15.36 | length 939.7
  Top Layer w10: R16.1 v1@3119.67,2714.67 ; v1(3823.31,2548.31) U15.36
  Bottom Layer w10: v1(3120,2715) 3265,2715 3431.69,2548.31 v1(3823.31,2548.31)
TIM4_CH1: R17.4 U15.59 | length 1180.7
  Top Layer w10: R17.4 3027.92,2857.64 3097.36,2857.64 3150,2805 v1(3485,2805) ; v1(3910,2860) 3913.94,2863.94 U15.59
  Bottom Layer w10: v1(3485,2805) 3590,2805 3645,2860 v1(3910,2860)
TIM4_CH2: R17.3 U15.60 | length 1181.6
  Top Layer w10: R17.3 3103.32,2886.68 3150,2840 3375,2840 3383,2848 3457,2848 v1(3460,2845) ; v1(3986.38,2883.62) U15.60
  Bottom Layer w10: v1(3460,2845) 3470,2835 3588.28,2835 3636.78,2883.5 3986.26,2883.5 v1(3986.38,2883.62)
TIM4_CH3: pad.0@3485,2865 R17.2 U15.61 | length 1172.1
  Top Layer w10: R17.2 3101.82,2918.18 3155,2865 v1(3485,2865) ; v1(3945,2905) U15.61
  Bottom Layer w10: v1(3485,2865) 3590,2865 3630,2905 v1(3945,2905)
TIM4_CH4: R17.1 U15.62 | length 1194.9
  Top Layer w10: R17.1 3105.33,2949.67 3175,2880 3455,2880 3475,2900 v1(3500,2900) ; v1(3980,2930) 3987.01,2922.99 U15.62
  Bottom Layer w10: v1(3500,2900) 3595,2900 3621.5,2926.5 3984.47,2926.5 3980.97,2930 v1(3980,2930)
USART1_RX: R11.3 U15.69 | length 1163.3
  Top Layer w10: U15.69 4224.21,3060.79 4245,3040 4245,2525 4485,2285 4485,2185 4508.32,2161.68 R11.3
USART1_RX_I: R11.6 USART1.4 | length 420.6
  Top Layer w10: R11.6 v1@4703.32,2161.68 ; v1(4690,2075) 4690,2000 4807.77,1882.23 USART1.4
  Bottom Layer w10: v1(4690,2075) 4705,2090 v1(4705,2160)
USART1_TX: R11.4 U15.68 | length 1176.4
  Top Layer w10: U15.68 4217.89,3041.11 4230,3029 4230,2515 4465,2280 4465,2165 4499.81,2130.19 R11.4
USART1_TX_I: R11.5 USART1.3 | length 346.1
  Top Layer w10: R11.5 4704.81,2130.19 4720,2115 4720,2000 4798.4,1921.6 USART1.3
USART2_RX: R11.1 U15.87 | length 1600.6
  Top Layer w10: v1(3882.37,3182.63) U15.87 ; v1(4270,2680) 4385,2680 4470,2595 v1(4470,2360) ; v1(4535,2230) 4540.33,2224.67 R11.1 R11.1@4589.53,2225.47
  Bottom Layer w10: v1(3882.37,3182.63) 3925,3140 4225,3140 4295,3070 4295,2715 4270,2690 v1(4270,2680) ; v1(4470,2360) 4470,2295 v1(4535,2230)
USART2_RX_I: R11.8 USART2.4 | length 213.7
  Top Layer w10: R11.8 4719.67,2224.67 v1(4725,2230) ; v1(4805,2257.23) USART2.4
  Bottom Layer w10: v1(4725,2230) 4725,2235 4747.23,2257.23 v1(4805,2257.23)
USART2_TX: R11.2 U15.86 | length 1604
  Top Layer w10: U15.86 3902.05,3202.95 v1(3920,3185) ; v1(4310,2700) 4395,2700 4500,2595 4500,2220 4526.82,2193.18 R11.2
  Bottom Layer w10: v1(3920,3185) 4225,3185 4320,3090 4320,2710 v1(4310,2700)
USART2_TX_I: R11.7 USART2.3 | length 274
  Top Layer w10: R11.7 4698.18,2193.18 v1(4700,2195) ; v1(4805,2296.6) USART2.3
  Bottom Layer w10: v1(4700,2195) 4698,2197 4698,2248 4746.6,2296.6 v1(4805,2296.6)
USART3_RX: R14.1 U15.48 | length 1011.7
  Top Layer w10: v1(4059.53,2545.47) U15.48 ; v1@4475.33,2960.33 R14.1
  Bottom Layer w10: v1(4059.53,2545.47) 4085,2520 4365,2520 4475,2630 v1(4475,2960)
USART3_RX_I: R14.8 USART3.4 | length 477.2
  Top Layer w10: R14.8 4647.52,2782.48 4675,2755 v1(4715,2755) ; v1(4787.77,2642.23) USART3.4
  Bottom Layer w10: v1(4715,2755) 4740,2755 4755,2740 4755,2665 4777.77,2642.23 v1(4787.77,2642.23)
USART3_TX: R14.2 U15.47 | length 1145.5
  Top Layer w10: v1(4010,2540) 4010,2555 4039.85,2584.85 U15.47 ; v1@4528.18,2991.82 R14.2
  Bottom Layer w10: v1(4010,2540) 4060,2490 4405,2490 4525,2610 v1(4525,2995)
USART3_TX_I: R14.7 USART3.3 | length 475.2
  Top Layer w10: R14.7 4678.18,2991.82 4715,2955 v1(4715,2790) ; v1(4788.4,2681.6) USART3.3
  Bottom Layer w10: v1(4715,2790) 4770,2790 4788.4,2771.6 v1(4788.4,2681.6)
USART4_RX: R14.3 U15.24 | length 1298.5
  Top Layer w10: U15.24 3608.86,2726.14 v1(3625,2710) ; v1(4270,3000) 4290,2980 4445,2980 4488.32,3023.32 R14.3
  Bottom Layer w10: v1(3625,2710) 3900,2710 4025,2835 4025,3005 4050,3030 4245,3030 4270,3005 v1(4270,3000)
USART4_RX_I: pad.0@4777.77,3002.23 R14.6 USART4.4 | length 191.3
  Top Layer w10: R14.6@4650.84,3020 v1(4700,3020) ; v1(4790,3002.23) USART4.4
  Bottom Layer w10: v1(4700,3020) 4710,3020 4727.77,3002.23 v1(4790,3002.23)
USART4_TX: pad.0@3624.17,2745.83 pad.0@4260,3055 R14.4 U15.23 | length 1285
  Top Layer w10: U15.23 v1(3624.17,2745.83) ; v1(4260,3055) 4295,3055 4346,3004 4439,3004 4489.81,3054.81 R14.4
  Bottom Layer w10: v1(3624.17,2745.83) 3890.83,2745.83 4005,2860 4005,3025 4035,3055 v1(4260,3055)
USART4_TX_I: R14.5 USART4.3 | length 212.7
  Top Layer w10: R14.5 v1@4709.81,3054.81 ; v1(4785,3055) 4780,3055 4793.4,3041.6 USART4.3
  Bottom Layer w10: v1(4700,3055) v1(4785,3055)
USART5_RX: R15.3 U15.83 | length 1331.3
  Top Layer w10: v1(3925,3305) 3940,3305 3961.11,3283.89 U15.83 ; v1(4500,3490) 4500,3540 4571.68,3611.68 R15.3
  Bottom Layer w10: v1(3925,3305) 3925,3325 3970,3370 3970,3420 4010,3460 4260,3460 4280,3440 4280,3278.92 4293.92,3265 4435,3265 4470,3300 4470,3460 v1(4500,3490)
USART5_RX_I: R15.6 USART5.4 | length 424.2
  Top Layer w10: R15.6 4723.32,3611.68 4760,3575 4760,3530 4712.5,3482.5 4712.5,3427.5 v1(4715,3425) ; v1(4777.77,3342.23) USART5.4
  Bottom Layer w10: v1(4715,3425) 4715,3405 v1(4777.77,3342.23)
USART5_TX: R15.4 U15.80 | length 1310.1
  Top Layer w10: v1(4015,3305) 4020.16,3299.84 U15.80 ; v1(4540,3480) 4535,3485 4535,3530 4585.19,3580.19 R15.4
  Bottom Layer w10: v1(4015,3305) 4020,3305 4070,3355 4070,3425 4085,3440 4245,3440 4265,3420 4265,3265 4285,3245 4565,3245 4590,3270 4590,3430 v1(4540,3480)
USART5_TX_I: R15.5 USART5.3 | length 334
  Top Layer w10: v1(4680,3520) 4682.52,3522.52 R15.5 ; v1(4778.4,3381.6) USART5.3
  Bottom Layer w10: v1(4680,3520) 4685,3525 4740,3525 4778.4,3486.6 v1(4778.4,3381.6)
VCC_2S~6S: D2.1 R4.1 VCC_IN.1 VCC_IN.2 VCC_IN.3 | length 370.2
  Top Layer w20: D2.1 D2.1@4698.24,1630.34
  Top Layer w30: D2.1 R4.1@4688.58,1743.92 ; D2.1@4698.24,1630.34 4700.47,1628.11 VCC_IN.2 ; VCC_IN.3 VCC_IN.2 ; VCC_IN.1 VCC_IN.2
VCC_3.3V: C5.2 R7.1 R20.2 SWD.4 T4.1 U11.5 U15.6 U15.11 U15.19 U15.21 U15.22 U15.28 U15.50 U15.75 U15.100 W1.3 W1.7 W1.8 | length 6630.9
  Top Layer w10: U11.5 3335.6,2150.6 3375,2190 3625,2190 ; v1(3430,2700) 3450,2700 3515.51,2765.51 U15.22 ; v1(3430,2730) 3455,2730 3510.2,2785.2 U15.21 ; v1@3430.43,2824.57 U15.19 ; v1@3430.48,3080.48 U15.6 ; v1@3432.05,2982.05 U15.11 ; v1(3515,3415) R7.1 ; v1(3575,3305) 3615,3305 3626.46,3293.54 U15.100 ; T4.1@3601.39,2097.5 3625,2097.5 3625,2190 ; v1(3665,2570) 3625,2530 3625,2190 ; v1@3665.83,2570.83 U15.28 ; R20.2 3987.5,2097.5 4090,1995 4245,1995 4275,2025 4275,2125 4255,2145 W1.7 W1.8 C5.2@4304.7,2195 ; v1@4098.9,2571.1 U15.50 ; U15.75 v1(4285,3178.9) 4323.9,3178.9 4370,3225 4370,3520 v1@4565,3715 ; v1@4767.23,3687.23 SWD.4
  Top Layer w20: T4.1 R20.2@3813.21,2095.71 ; R20.2 R20.2@3813.21,2095.71 ; W1.3 3813.91,2095 R20.2@3813.21,2095.71
  Bottom Layer w10: v1(3515,3415) 3515,3325 3535,3305 v1(3575,3305) 3575,3287.5 ; v1@4099.06,2570 v1(3665,2570) 3480,2570 3430,2620 v1(3430,2700) v1(3430,2730) v1(3430,2830) v1(3430,2980) v1(3430,3080) 3430,3260 3455,3285 3700,3285 3740,3325 3870,3325 3915,3280 4190,3280 4285,3185 v1(4285,3178.9) ; v1(4565,3720) 4730,3720 v1(4765,3685)
  other v1: 4099.53,2570.47
VCC_5.0V: C3.2 C4.2 D1.2 H4.8 PPM.2 PWM_IN.2 R31.1 RGB.1 SBUS.2 U11.1 U11.3 USART1.1 USART2.1 USART3.1 USART4.1 USART5.1 USB.1 V.1 V.2 V.3 V.4 | length 8509
  Top Layer w10: 2745,3315 2745.47,3314.53 USB.1 2859.53,3314.53 2885,3340 ; 4755.34,2375.34 4762,2375.34
  Top Layer w20: 2625,2649.37 PWM_IN.2 ; 2678.72,2351.28 PPM.2 2922.46,2351.28 ; C3.2@3114,2116 U11.1 3269,2116 3285,2100 3285,2055 3272,2042 U11.3 v1(3233.6,2001.4) ; 4745.42,3120.34 USART4.1 ; 4760.34,2760.34 USART3.1 ; 4762,2375.34 USART2.1 ; 4800,2000.34 USART1.1
  Top Layer w30: 2678.09,2351.91 2625,2405 2625,2649.37 2625,3265 2675,3315 2745,3315 ; SBUS.2@2778.08,1998.72 2823.72,1998.72 2840,2015 2840,2100 2865,2125 C4.2 ; R31.1 2855,1665 2888.58,1698.58 D1.2 v1@2975,1822.8 ; 2885,3340 v1(2885,3385) ; 2923.09,2351.91 2950,2325 C4.2 ; C3.2 C4.2 ; v1(3105,3450) RGB.1 v1(3400,3450) ; H4.8@4523,3388 4730.33,3388 4740.77,3398.44 ; 4800,2000.34 4760,2040.34 v1(4752.2,2045) 4762,2054.8 4762,2375.34 4762,2615.67 4745,2632.67 4745,2691.33 4760,2706.33 4760,2979.91 4740.77,2999.14 4740.77,3398.44 ; USART5.1@4829.82,3460.97 4802.96,3460.97 4752,3410.01 4752,3409.67 4740.77,3398.44
  Bottom Layer w10: v1(4752.2,2045) v1@4753.6,2046.4
  Bottom Layer w30: v1(2885,3385) 2885,3415 2920,3450 v1(3105,3450) ; v1(2978.6,1826.4) 3022.2,1870 3240,1870 ; v1(3233.6,2001.4) 3233.6,1876.4 3240,1870 ; v1(3400,3450) 3400,3687.56 3481.22,3768.78 V.4 V.3 V.2 V.1 ; v1(4752.2,2045) 4745.2,2038 4468,2038 4300,1870 3240,1870
VCC_IN: D2.2 T1.1 U1.7 | length 807.7
  Top Layer w30: v1(4060,1545) 4115,1490 4494.7,1490 T1.1 ; v1@4060,1668.38 4093.47,1701.85 U1.7 ; T1.1@4511.42,1512.48 D2.2
  Bottom Layer w30: v1(4060,1545) v1(4060,1665)
pads on no net: PPM.0 PWM_IN.0 SBUS.0 SWD.5 U1.2 U1.3 U1.5 U15.2 U15.3 U15.4 U15.5 U15.7 U15.8 U15.9 U15.15 U15.16 U15.17 U15.18 U15.25 U15.26 U15.33 U15.38 U15.39 U15.41 U15.43 U15.46 U15.55 U15.56 U15.57 U15.58 U15.65 U15.66 U15.67 U15.77 U15.82 U15.84 U15.85 U15.88 U15.89 U15.90 U15.91 U15.92 U15.93 U15.95 U15.96 USART1.5 USART2.5 USART3.5 USART4.5 USART5.5 USB.4 VCC_IN.PAD

## Polygon pours and split planes (outlines as drawn)
GND on Top Layer "Top Layer-No Net" (solid, remove dead copper, pour order 22): 2475,4160 2475,1320 2485,1310 2500,1325 5200,1325 5200,4150 5190,4160 2475,4160
VCC_2S~6S on Top Layer "Top Layer-No Net" (solid, remove dead copper, pour order 20): 4905,1685 4905,1575 4635,1575 4635,1795 4740,1795 4740,1685 4905,1685
GND on Bottom Layer "Top Layer-No Net" (solid, remove dead copper, pour order 24): 2490,4160 5195,4160 5200,4155 5200,1345 5200,1325 5190,1335 2470,1335 2470,4155 2480,4165

## Keep-outs
Keep-Out Layer:
  lines w10: 2470,1305 2470,4155 ; 2470,4160 5200,4160 5200,1310 2480,1310

## Other copper
Bottom Layer:
  text "VCGD" at 4890,3850 h60 r90
  text "VGTR" at 5100,3505 h60 r90
  text "VGTR" at 5105,3160 h60 r90
  text "VGTR" at 5105,2790 h60 r90
  text "GVPWM1-8" at 2580,2595 h60 r270
  text "VGTR" at 5120,2415 h60 r90
  text "GVP" at 2560,2275 h60 r270
  text "VGTR" at 5110,2035 h60 r90
  text "GVS" at 2580,1915 h60 r270
  text "V-G" at 5095,1635 h60 r90

## Silkscreen, mask and mechanical layers (free items; w line width, h text height)
Top Overlay:
  text "19四轴飞控板" at 4365,3935 h150